# Altium PCB PCB1.PcbDoc (part 7 of 10)
Units mm, origin at the board's own origin, x right, y up, seen from the top; angles counter-clockwise.
Board outline 171.83 x 244.04 mm, 2 copper layers (Top Layer, Bottom Layer); 100 components, 186 nets, 878 pads, 221 vias.
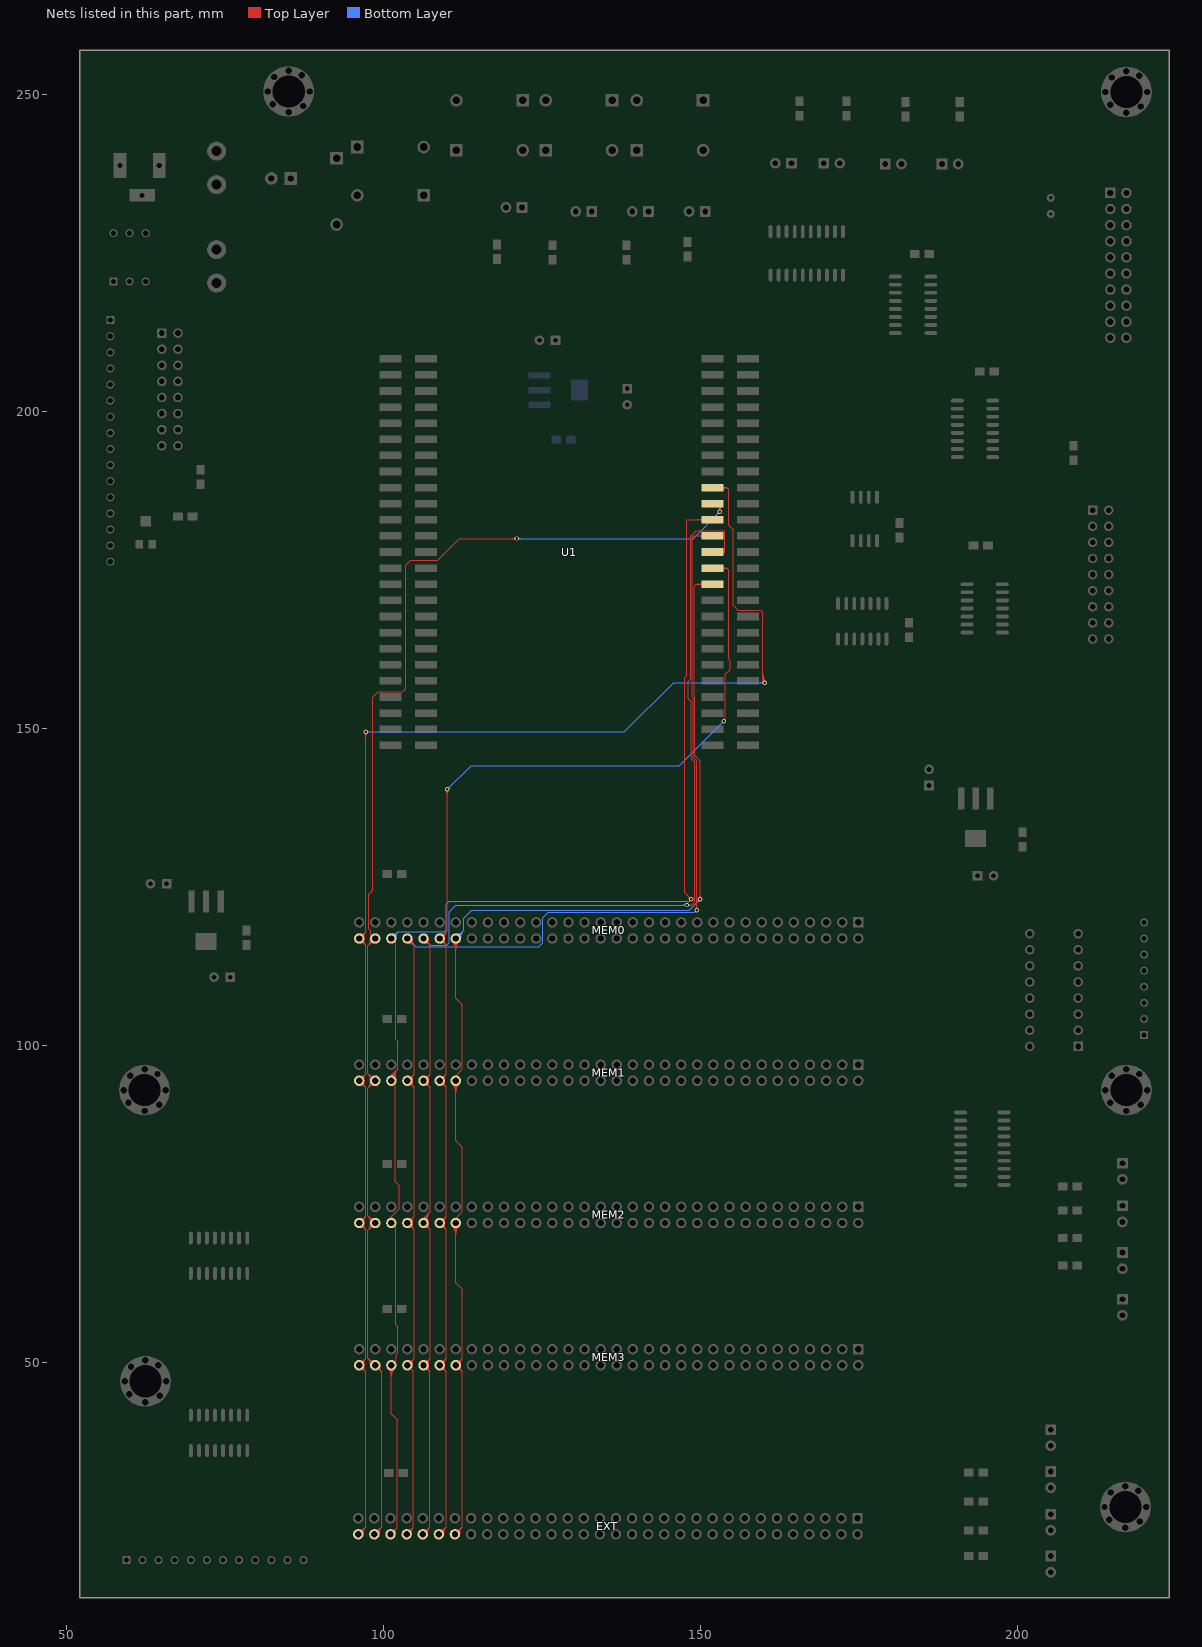
[diagram p7: the nets of this part, all layers, seen from the top]

## Via types
v1: diameter 0.7, hole 0.4, Top Layer to Bottom Layer, 221 vias

## Nets (pads, with @x,y where several pads share a name; then routed paths per layer and width w, separated by ;. In a path a pad name is that pad's centre, name@x,y a point inside that pad or via, vN(x,y) a via of type N, cw(c..) or ccw(c..) an arc to the next point about the centre after c; other vN are vias at no path point) (continued)
D25: EXT.52 MEM0.52 MEM1.52 MEM2.52 MEM3.52 U1.29 | length 240.2
  Top Layer w0.152: MEM2.52@110.85,71.437 cw(c109.571,70.159) 111.379,70.159 cw(c113.187,70.159) MEM2.52@111.908,71.437 ; MEM1.52@110.85,93.874 cw(c109.571,92.596) 111.379,92.596 cw(c113.187,92.596) MEM1.52@111.908,93.874 ; MEM0.52@110.85,116.311 cw(c109.571,115.032) 111.379,115.032 cw(c113.187,115.032) MEM0.52@111.908,116.311 ; MEM2.52@110.957,71.545 cw(c109.939,70.527) 111.379,70.527 cw(c112.819,70.527) MEM2.52@111.801,71.545 ; MEM1.52@110.957,93.982 cw(c109.939,92.963) 111.379,92.963 cw(c112.819,92.963) MEM1.52@111.801,93.982 ; MEM0.52@110.957,116.418 cw(c109.939,115.4) 111.379,115.4 cw(c112.819,115.4) MEM0.52@111.801,116.418 ; MEM2.52@111.065,71.653 cw(c110.307,70.895) 111.379,70.895 cw(c112.451,70.895) MEM2.52@111.693,71.653 ; MEM1.52@111.065,94.089 cw(c110.307,93.331) 111.379,93.331 cw(c112.451,93.331) MEM1.52@111.693,94.089 ; MEM0.52@111.065,116.526 cw(c110.307,115.768) 111.379,115.768 cw(c112.451,115.768) MEM0.52@111.693,116.526 ; EXT.52@111.252,22.86 112.395,24.003 ; EXT.52@111.288,23.302 ccw(c111.355,24.112) 111.93,23.538 ccw(c112.504,22.963) EXT.52@111.694,22.896 ; EXT.52@111.301,23.454 ccw(c111.391,24.542) 112.162,23.77 ccw(c112.934,22.999) EXT.52@111.846,22.909 ; EXT.52@111.314,23.606 ccw(c111.426,24.972) 112.395,24.003 ; MEM0.52@111.379,116.84 111.379,107.417 112.42,106.375 112.42,96.19 111.379,95.148 MEM1.52@111.379,94.403 111.379,84.963 112.42,83.922 112.42,73.762 111.379,72.72 MEM2.52@111.379,71.967 111.379,62.56 112.42,61.519 112.42,50.571 ; MEM3.52@111.448,49.969 ccw(c111.546,50.598) 111.996,50.147 ccw(c112.447,49.697) MEM3.52@111.818,49.599 ; MEM3.52@111.457,49.093 cw(c111.56,48.507) 111.981,48.928 cw(c112.402,49.349) MEM3.52@111.816,49.452 ; MEM3.52@111.471,50.119 ccw(c111.604,50.964) 112.208,50.359 ccw(c112.813,49.755) MEM3.52@111.968,49.622 ; MEM3.52@111.483,48.943 cw(c111.623,48.155) 112.188,48.721 cw(c112.754,49.286) MEM3.52@111.966,49.426 ; MEM3.52@111.495,50.27 ccw(c111.661,51.331) 112.42,50.571 ; MEM3.52@111.51,48.793 cw(c111.685,47.804) 112.395,48.514 ; EXT.52@111.998,22.922 cw(c113.364,23.034) 112.395,24.003 ; MEM3.52@112.116,49.399 ccw(c113.105,49.224) 112.395,48.514 ; MEM3.52@112.119,49.646 cw(c113.18,49.812) 112.42,50.571 ; v1@149.743,123.204 ccw(c149.275,123.672) 149.936,123.672 ccw(c150.597,123.672) v1@150.13,123.204 ; v1(149.936,123.011) 149.936,144.837 149.098,145.676 149.098,155.174 149.022,155.25 149.022,172.403 149.339,172.72 U1.29@151.892,172.72 ; U1.29@150.372,172.35 ccw(c149.477,171.455) 149.477,172.72 ccw(c149.477,173.985) U1.29@150.372,173.09 ; U1.29@150.479,172.457 ccw(c149.845,171.823) 149.845,172.72 ccw(c149.845,173.617) U1.29@150.479,172.983 ; 112.395,24.003 112.395,48.514 ; 112.395,48.514 MEM3.52@111.379,49.53 112.42,50.571
  Bottom Layer w0.152: MEM0.52@111.379,116.84 112.674,118.135 112.674,120.066 113.894,121.285 148.211,121.285 v1(149.936,123.011) ; MEM0.52@111.379,117.284 ccw(c111.379,118.356) 112.137,117.598 ccw(c112.895,116.84) MEM0.52@111.823,116.84 ; MEM0.52@111.379,117.436 ccw(c111.379,118.876) 112.397,117.858 ccw(c113.415,116.84) MEM0.52@111.975,116.84 ; MEM0.52@111.379,117.589 ccw(c111.379,119.397) 112.657,118.118 ccw(c113.936,116.84) MEM0.52@112.128,116.84 ; v1@149.662,123.011 cw(c149.001,123.011) 149.469,122.543 cw(c149.936,122.076) v1@149.936,122.737
D26: EXT.54 MEM0.54 MEM1.54 MEM2.54 MEM3.54 U1.27 | length 246.5
  Top Layer w0.152: EXT.54@108.712,22.86 109.855,24.003 ; EXT.54@108.748,23.302 ccw(c108.815,24.112) 109.39,23.538 ccw(c109.964,22.963) EXT.54@109.154,22.896 ; EXT.54@108.761,23.454 ccw(c108.851,24.542) 109.622,23.77 ccw(c110.394,22.999) EXT.54@109.306,22.909 ; EXT.54@108.774,23.606 ccw(c108.886,24.972) 109.855,24.003 ; MEM0.54@108.861,117.283 ccw(c108.906,118.189) 109.547,117.548 ccw(c110.188,116.907) MEM0.54@109.282,116.862 ; MEM0.54@108.869,117.436 ccw(c108.929,118.652) 109.79,117.791 ccw(c110.651,116.93) MEM0.54@109.435,116.87 ; MEM0.54@108.876,117.588 ccw(c108.952,119.115) 110.033,118.034 ; MEM3.54@108.908,49.969 ccw(c109.006,50.598) 109.456,50.147 ccw(c109.907,49.697) MEM3.54@109.278,49.599 ; MEM2.54@108.908,71.528 cw(c109.006,70.899) 109.456,71.349 cw(c109.907,71.799) MEM2.54@109.278,71.898 ; MEM2.54@108.908,72.405 ccw(c109.006,73.034) 109.456,72.584 ccw(c109.907,72.134) MEM2.54@109.278,72.035 ; MEM1.54@108.908,93.965 cw(c109.006,93.336) 109.456,93.786 cw(c109.907,94.236) MEM1.54@109.278,94.335 ; MEM1.54@108.908,94.842 ccw(c109.006,95.471) 109.456,95.021 ccw(c109.907,94.571) MEM1.54@109.278,94.472 ; MEM0.54@108.908,116.401 cw(c109.006,115.772) 109.456,116.223 cw(c109.907,116.673) MEM0.54@109.278,116.771 ; MEM3.54@108.917,49.093 cw(c109.02,48.507) 109.441,48.928 cw(c109.862,49.349) MEM3.54@109.276,49.452 ; MEM3.54@108.931,50.119 ccw(c109.064,50.964) 109.668,50.359 ccw(c110.273,49.755) MEM3.54@109.428,49.622 ; MEM2.54@108.931,71.377 cw(c109.064,70.533) 109.668,71.137 cw(c110.273,71.742) MEM2.54@109.428,71.874 ; MEM2.54@108.931,72.556 ccw(c109.064,73.401) 109.668,72.796 ccw(c110.273,72.191) MEM2.54@109.428,72.059 ; MEM1.54@108.931,93.814 cw(c109.064,92.969) 109.668,93.574 cw(c110.273,94.179) MEM1.54@109.428,94.311 ; MEM1.54@108.931,94.993 ccw(c109.064,95.837) 109.668,95.233 ccw(c110.273,94.628) MEM1.54@109.428,94.496 ; MEM0.54@108.931,116.251 cw(c109.064,115.406) 109.668,116.011 cw(c110.273,116.615) MEM0.54@109.428,116.748 ; MEM3.54@108.943,48.943 cw(c109.083,48.155) 109.648,48.721 cw(c110.214,49.286) MEM3.54@109.426,49.426 ; MEM3.54@108.955,50.27 ccw(c109.121,51.331) 109.88,50.571 ; MEM2.54@108.955,71.227 cw(c109.121,70.166) 109.88,70.925 ; MEM2.54@108.955,72.706 ccw(c109.121,73.767) 109.88,73.008 ; MEM1.54@108.955,93.664 cw(c109.121,92.603) 109.88,93.362 ; MEM1.54@108.955,95.143 ccw(c109.121,96.204) 109.88,95.445 ; MEM0.54@108.955,116.1 cw(c109.121,115.039) 109.88,115.799 ; MEM3.54@108.97,48.793 cw(c109.145,47.804) 109.855,48.514 ; EXT.54@109.458,22.922 cw(c110.824,23.034) 109.855,24.003 ; MEM3.54@109.576,49.399 ccw(c110.565,49.224) 109.855,48.514 ; MEM3.54@109.579,49.646 cw(c110.64,49.812) 109.88,50.571 ; MEM2.54@109.579,71.851 ccw(c110.64,71.685) 109.88,70.925 ; MEM2.54@109.579,72.083 cw(c110.64,72.249) 109.88,73.008 ; MEM1.54@109.579,94.287 ccw(c110.64,94.121) 109.88,93.362 ; MEM1.54@109.579,94.519 cw(c110.64,94.685) 109.88,95.445 ; MEM0.54@109.579,116.724 ccw(c110.64,116.558) 109.88,115.799 ; MEM0.54@109.587,116.877 cw(c111.114,116.953) 110.033,118.034 ; v1@109.839,140.167 cw(c109.372,139.699) 110.033,139.699 cw(c110.694,139.699) v1@110.226,140.167 ; v1(110.033,140.36) 110.033,118.034 ; U1.27@151.892,175.26 154.089,175.26 ; U1.27@153.339,175.037 cw(c153.784,174.704) 153.784,175.26 cw(c153.784,175.816) U1.27@153.339,175.483 ; U1.27@153.461,174.946 cw(c154.089,174.475) 154.089,175.26 ; U1.27@153.461,175.574 ccw(c154.089,176.045) 154.089,175.26 ; v1(153.67,151.13) 153.906,151.366 153.906,158.49 154.68,159.265 154.68,160.68 154.407,160.954 154.407,174.942 154.089,175.26 ; 109.855,24.003 109.855,48.514 ; 109.855,48.514 MEM3.54@108.839,49.53 109.88,50.571 ; 109.88,50.571 109.88,70.925 ; 109.88,70.925 MEM2.54@108.839,71.967 109.88,73.008 ; 109.88,73.008 109.88,93.362 ; 109.88,93.362 MEM1.54@108.839,94.403 109.88,95.445 ; 109.88,95.445 109.88,115.799 ; 109.88,115.799 MEM0.54@108.839,116.84 110.033,118.034
  Bottom Layer w0.152: v1(110.033,140.36) 113.792,144.12 146.66,144.12 v1(153.67,151.13) ; v1@110.033,140.634 ccw(c110.033,141.295) 110.5,140.828 ccw(c110.968,140.36) v1@110.307,140.36
D27: EXT.56 MEM0.56 MEM1.56 MEM2.56 MEM3.56 U1.25 | length 265.8
  Top Layer w0.152: EXT.56@106.172,22.86 107.315,24.003 ; EXT.56@106.208,23.302 ccw(c106.275,24.112) 106.85,23.538 ccw(c107.424,22.963) EXT.56@106.614,22.896 ; EXT.56@106.221,23.454 ccw(c106.311,24.542) 107.082,23.77 ccw(c107.854,22.999) EXT.56@106.766,22.909 ; EXT.56@106.234,23.606 ccw(c106.346,24.972) 107.315,24.003 ; MEM2.56@106.287,71.962 cw(c107.14,72.275) 106.497,72.918 ; MEM0.56@106.299,116.84 107.34,115.799 ; MEM3.56@106.368,49.969 ccw(c106.466,50.598) 106.916,50.147 ccw(c107.367,49.697) MEM3.56@106.738,49.599 ; MEM2.56@106.368,71.528 cw(c106.466,70.899) 106.916,71.349 cw(c107.367,71.799) MEM2.56@106.738,71.898 ; MEM1.56@106.368,93.965 cw(c106.466,93.336) 106.916,93.786 cw(c107.367,94.236) MEM1.56@106.738,94.335 ; MEM1.56@106.368,94.842 ccw(c106.466,95.471) 106.916,95.021 ccw(c107.367,94.571) MEM1.56@106.738,94.472 ; MEM0.56@106.368,116.401 cw(c106.466,115.772) 106.916,116.223 cw(c107.367,116.673) MEM0.56@106.738,116.771 ; MEM3.56@106.377,49.093 cw(c106.48,48.507) 106.901,48.928 cw(c107.322,49.349) MEM3.56@106.736,49.452 ; MEM3.56@106.391,50.119 ccw(c106.524,50.964) 107.128,50.359 ccw(c107.733,49.755) MEM3.56@106.888,49.622 ; MEM2.56@106.391,71.377 cw(c106.524,70.533) 107.128,71.137 cw(c107.733,71.742) MEM2.56@106.888,71.874 ; MEM1.56@106.391,93.814 cw(c106.524,92.969) 107.128,93.574 cw(c107.733,94.179) MEM1.56@106.888,94.311 ; MEM1.56@106.391,94.993 ccw(c106.524,95.837) 107.128,95.233 ccw(c107.733,94.628) MEM1.56@106.888,94.496 ; MEM0.56@106.391,116.251 cw(c106.524,115.406) 107.128,116.011 cw(c107.733,116.615) MEM0.56@106.888,116.748 ; MEM3.56@106.403,48.943 cw(c106.543,48.155) 107.108,48.721 cw(c107.674,49.286) MEM3.56@106.886,49.426 ; MEM3.56@106.415,50.27 ccw(c106.581,51.331) 107.34,50.571 ; MEM2.56@106.415,71.227 cw(c106.581,70.166) 107.34,70.925 ; MEM1.56@106.415,93.664 cw(c106.581,92.603) 107.34,93.362 ; MEM1.56@106.415,95.143 ccw(c106.581,96.204) 107.34,95.445 ; MEM0.56@106.415,116.1 cw(c106.581,115.039) 107.34,115.799 ; MEM3.56@106.43,48.793 cw(c106.605,47.804) 107.315,48.514 ; MEM2.56@106.43,72.015 cw(c107.387,72.366) 106.666,73.087 ; MEM2.56@106.573,72.067 cw(c107.633,72.457) 106.834,73.256 ; MEM2.56@106.716,72.12 cw(c107.88,72.547) 107.003,73.424 ; MEM2.56@106.859,72.172 cw(c108.127,72.638) 107.172,73.593 ; EXT.56@106.918,22.922 cw(c108.284,23.034) 107.315,24.003 ; MEM2.56@107.002,72.225 cw(c108.374,72.728) 107.34,73.762 ; MEM3.56@107.036,49.399 ccw(c108.025,49.224) 107.315,48.514 ; MEM3.56@107.039,49.646 cw(c108.1,49.812) 107.34,50.571 ; MEM2.56@107.039,71.851 ccw(c108.1,71.685) 107.34,70.925 ; MEM1.56@107.039,94.287 ccw(c108.1,94.121) 107.34,93.362 ; MEM1.56@107.039,94.519 cw(c108.1,94.685) 107.34,95.445 ; MEM0.56@107.039,116.724 ccw(c108.1,116.558) 107.34,115.799 ; v1(147.853,122.123) 148.641,122.123 149.067,122.549 149.067,144.651 148.539,145.179 148.539,154.158 148.024,154.673 148.024,157.391 148.443,157.81 148.443,180.295 149.301,181.153 153.822,181.153 153.848,181.127 153.848,177.825 153.822,177.8 ; v1@148.047,121.93 cw(c148.514,121.462) 148.514,122.123 cw(c148.514,122.784) v1@148.047,122.317 ; U1.25@151.892,177.8 153.822,177.8 ; U1.25@153.527,177.602 cw(c153.822,177.481) 153.822,177.8 ; U1.25@153.527,177.998 ccw(c153.822,178.119) 153.822,177.8 ; 107.315,24.003 107.315,48.514 ; 107.315,48.514 MEM3.56@106.299,49.53 107.34,50.571 ; 107.34,50.571 107.34,70.925 ; 107.34,70.925 MEM2.56@106.299,71.967 106.299,72.72 107.34,73.762 ; 107.34,73.762 107.34,93.362 ; 107.34,93.362 MEM1.56@106.299,94.403 107.34,95.445 ; 107.34,95.445 107.34,115.799
  Bottom Layer w0.152: MEM0.56@106.299,116.84 107.327,115.812 ; MEM0.56@106.372,116.402 cw(c106.474,115.795) 106.909,116.23 cw(c107.344,116.665) MEM0.56@106.737,116.767 ; MEM0.56@106.397,116.252 cw(c106.534,115.437) 107.118,116.021 cw(c107.702,116.605) MEM0.56@106.887,116.742 ; MEM0.56@106.422,116.101 cw(c106.594,115.078) 107.327,115.812 ; MEM0.56@107.038,116.717 ccw(c108.061,116.545) 107.327,115.812 ; v1@147.66,121.93 ccw(c147.192,121.462) 147.192,122.123 ccw(c147.192,122.784) v1@147.66,122.317 ; v1(147.853,122.123) 111.366,122.123 110.338,121.094 110.338,116.205 109.944,115.812 107.327,115.812
D28: EXT.58 MEM0.58 MEM1.58 MEM2.58 MEM3.58 U1.23 | length 255.7
  Top Layer w0.152: EXT.58@103.632,22.86 104.673,23.901 ; EXT.58@103.701,23.299 ccw(c103.799,23.928) 104.249,23.477 ccw(c104.7,23.027) EXT.58@104.071,22.929 ; EXT.58@103.724,23.449 ccw(c103.857,24.294) 104.461,23.689 ccw(c105.066,23.085) EXT.58@104.221,22.952 ; EXT.58@103.748,23.6 ccw(c103.914,24.661) 104.673,23.901 ; MEM0.58@103.759,116.84 104.8,115.799 ; MEM3.58@103.828,49.969 ccw(c103.926,50.598) 104.376,50.147 ccw(c104.827,49.697) MEM3.58@104.198,49.599 ; MEM2.58@103.828,71.528 cw(c103.926,70.899) 104.376,71.349 cw(c104.827,71.799) MEM2.58@104.198,71.898 ; MEM2.58@103.828,72.405 ccw(c103.926,73.034) 104.376,72.584 ccw(c104.827,72.134) MEM2.58@104.198,72.035 ; MEM1.58@103.828,93.965 cw(c103.926,93.336) 104.376,93.786 cw(c104.827,94.236) MEM1.58@104.198,94.335 ; MEM1.58@103.828,94.842 ccw(c103.926,95.471) 104.376,95.021 ccw(c104.827,94.571) MEM1.58@104.198,94.472 ; MEM0.58@103.828,116.401 cw(c103.926,115.772) 104.376,116.223 cw(c104.827,116.673) MEM0.58@104.198,116.771 ; MEM3.58@103.851,50.119 ccw(c103.984,50.964) 104.588,50.359 ccw(c105.193,49.755) MEM3.58@104.348,49.622 ; MEM2.58@103.851,71.377 cw(c103.984,70.533) 104.588,71.137 cw(c105.193,71.742) MEM2.58@104.348,71.874 ; MEM2.58@103.851,72.556 ccw(c103.984,73.401) 104.588,72.796 ccw(c105.193,72.191) MEM2.58@104.348,72.059 ; MEM1.58@103.851,93.814 cw(c103.984,92.969) 104.588,93.574 cw(c105.193,94.179) MEM1.58@104.348,94.311 ; MEM1.58@103.851,94.993 ccw(c103.984,95.837) 104.588,95.233 ccw(c105.193,94.628) MEM1.58@104.348,94.496 ; MEM0.58@103.851,116.251 cw(c103.984,115.406) 104.588,116.011 cw(c105.193,116.615) MEM0.58@104.348,116.748 ; MEM3.58@103.875,50.27 ccw(c104.041,51.331) 104.8,50.571 ; MEM2.58@103.875,71.227 cw(c104.041,70.166) 104.8,70.925 ; MEM2.58@103.875,72.706 ccw(c104.041,73.767) 104.8,73.008 ; MEM1.58@103.875,93.664 cw(c104.041,92.603) 104.8,93.362 ; MEM1.58@103.875,95.143 ccw(c104.041,96.204) 104.8,95.445 ; MEM0.58@103.875,116.1 cw(c104.041,115.039) 104.8,115.799 ; EXT.58@104.372,22.976 cw(c105.433,23.142) 104.673,23.901 ; MEM3.58@104.499,49.646 cw(c105.56,49.812) 104.8,50.571 ; MEM2.58@104.499,71.851 ccw(c105.56,71.685) 104.8,70.925 ; MEM2.58@104.499,72.083 cw(c105.56,72.249) 104.8,73.008 ; MEM1.58@104.499,94.287 ccw(c105.56,94.121) 104.8,93.362 ; MEM1.58@104.499,94.519 cw(c105.56,94.685) 104.8,95.445 ; MEM0.58@104.499,116.724 ccw(c105.56,116.558) 104.8,115.799 ; v1@149.184,121.466 ccw(c148.716,121.933) 149.377,121.933 ccw(c150.038,121.933) v1@149.571,121.466 ; v1(149.377,121.272) 149.377,144.812 148.819,145.371 148.819,154.895 148.723,154.991 148.723,180.168 148.895,180.34 U1.23@151.892,180.34 ; U1.23@150.372,179.97 ccw(c149.477,179.075) 149.477,180.34 ccw(c149.477,181.605) U1.23@150.372,180.71 ; U1.23@150.479,180.077 ccw(c149.845,179.443) 149.845,180.34 ccw(c149.845,181.237) U1.23@150.479,180.603 ; 104.673,23.901 104.673,48.616 MEM3.58@103.759,49.53 104.8,50.571 ; 104.8,50.571 104.8,70.925 ; 104.8,70.925 MEM2.58@103.759,71.967 104.8,73.008 ; 104.8,73.008 104.8,93.362 ; 104.8,93.362 MEM1.58@103.759,94.403 104.8,95.445 ; 104.8,95.445 104.8,115.799
  Bottom Layer w0.152: MEM0.58@103.759,116.091 cw(c103.759,114.283) 105.037,115.562 cw(c106.316,116.84) MEM0.58@104.508,116.84 ; MEM0.58@103.759,116.244 cw(c103.759,114.804) 104.777,115.822 cw(c105.795,116.84) MEM0.58@104.355,116.84 ; MEM0.58@103.759,116.396 cw(c103.759,115.324) 104.517,116.082 cw(c105.275,116.84) MEM0.58@104.203,116.84 ; MEM0.58@103.759,116.84 105.067,115.532 124.511,115.532 125.12,116.141 125.12,120.129 125.946,120.955 149.06,120.955 v1(149.377,121.272)
D29: EXT.60 MEM0.60 MEM1.60 MEM2.60 MEM3.60 U1.21 | length 245.5
  Top Layer w0.152: MEM3.60@100.69,49.001 cw(c99.411,47.722) 101.219,47.722 cw(c103.027,47.722) MEM3.60@101.748,49.001 ; MEM3.60@100.797,49.108 cw(c99.779,48.09) 101.219,48.09 cw(c102.659,48.09) MEM3.60@101.641,49.108 ; MEM3.60@100.905,49.216 cw(c100.147,48.458) 101.219,48.458 cw(c102.291,48.458) MEM3.60@101.533,49.216 ; MEM2.60@101.043,72.695 ccw(c100.989,72.918) 101.219,72.918 ; MEM1.60@101.064,94.344 cw(c101.898,94.665) 101.266,95.297 ; EXT.60@101.092,22.86 102.133,23.901 ; EXT.60@101.161,23.299 ccw(c101.259,23.928) 101.709,23.477 ccw(c102.16,23.027) EXT.60@101.531,22.929 ; EXT.60@101.184,23.449 ccw(c101.317,24.294) 101.921,23.689 ccw(c102.526,23.085) EXT.60@101.681,22.952 ; MEM1.60@101.207,94.399 cw(c102.138,94.758) 101.432,95.463 ; EXT.60@101.208,23.6 ccw(c101.374,24.661) 102.133,23.901 ; MEM0.60@101.219,116.84 101.905,116.154 101.905,100.99 102.26,100.635 102.26,96.291 ; MEM1.60@101.349,94.453 cw(c102.377,94.85) 101.598,95.629 ; MEM2.60@101.395,72.695 cw(c101.449,72.918) 101.219,72.918 ; MEM1.60@101.491,94.508 cw(c102.616,94.942) 101.763,95.794 ; MEM1.60@101.633,94.563 cw(c102.855,95.034) 101.929,95.96 ; MEM1.60@101.775,94.618 cw(c103.094,95.126) 102.095,96.126 ; EXT.60@101.832,22.976 cw(c102.893,23.142) 102.133,23.901 ; MEM1.60@101.918,94.673 cw(c103.333,95.219) 102.26,96.291 ; v1@148.24,123.012 ccw(c147.579,123.012) 148.046,123.48 ccw(c148.514,123.947) v1@148.514,123.286 ; v1(148.514,123.012) 147.465,124.061 147.465,157.95 147.828,158.313 147.853,182.88 U1.21@151.892,182.88 ; U1.21@150.372,182.51 ccw(c149.477,181.615) 149.477,182.88 ccw(c149.477,184.145) U1.21@150.372,183.25 ; U1.21@150.479,182.617 ccw(c149.845,181.983) 149.845,182.88 ccw(c149.845,183.777) U1.21@150.479,183.143 ; 101.219,72.918 102.489,74.188 102.489,77.826 101.829,78.486 101.829,93.794 MEM1.60@101.219,94.403 101.219,95.25 102.26,96.291 ; 101.219,72.918 MEM2.60@101.219,71.967 101.905,71.281 101.905,55.956 102.26,55.601 102.26,51.486 101.981,51.206 101.981,50.292 MEM3.60@101.219,49.53 101.219,41.849 102.133,40.934 102.133,23.901
  Bottom Layer w0.152: MEM0.60@101.219,116.84 102.26,117.881 ; MEM0.60@101.288,117.279 ccw(c101.386,117.908) 101.836,117.457 ccw(c102.287,117.007) MEM0.60@101.658,116.909 ; MEM0.60@101.311,117.429 ccw(c101.444,118.274) 102.048,117.669 ccw(c102.653,117.065) MEM0.60@101.808,116.932 ; MEM0.60@101.335,117.58 ccw(c101.501,118.641) 102.26,117.881 ; MEM0.60@101.959,116.956 cw(c103.02,117.122) 102.26,117.881 ; v1(148.514,123.012) 148.196,122.695 110.338,122.695 109.88,122.237 109.88,118.224 109.537,117.881 102.26,117.881
D30: EXT.62 MEM0.62 MEM1.62 MEM2.62 MEM3.62 U1.19 | length 269.5
  Top Layer w0.152: MEM3.62@97.933,49.592 ccw(c96.567,49.704) 97.536,50.673 ; MEM2.62@97.933,71.905 cw(c96.567,71.793) 97.536,70.824 ; MEM2.62@97.933,72.028 ccw(c96.567,72.141) 97.536,73.11 ; MEM1.62@97.933,94.342 cw(c96.567,94.229) 97.536,93.26 ; MEM1.62@97.933,94.465 ccw(c96.567,94.577) 97.536,95.546 ; MEM0.62@97.933,116.778 cw(c96.567,116.666) 97.536,115.697 ; MEM3.62@98.085,49.579 ccw(c96.997,49.669) 97.769,50.44 ccw(c98.54,51.212) MEM3.62@98.63,50.124 ; MEM2.62@98.085,71.918 cw(c96.997,71.828) 97.769,71.056 cw(c98.54,70.285) MEM2.62@98.63,71.372 ; MEM2.62@98.085,72.016 ccw(c96.997,72.105) 97.769,72.877 ccw(c98.54,73.649) MEM2.62@98.63,72.561 ; MEM1.62@98.085,94.354 cw(c96.997,94.265) 97.769,93.493 cw(c98.54,92.721) MEM1.62@98.63,93.809 ; MEM1.62@98.085,94.452 ccw(c96.997,94.542) 97.769,95.314 ccw(c98.54,96.085) MEM1.62@98.63,94.998 ; MEM0.62@98.085,116.791 cw(c96.997,116.701) 97.769,115.93 cw(c98.54,115.158) MEM0.62@98.63,116.246 ; MEM3.62@98.237,49.566 ccw(c97.427,49.633) 98.001,50.208 ccw(c98.576,50.782) MEM3.62@98.643,49.972 ; MEM2.62@98.237,71.93 cw(c97.427,71.863) 98.001,71.289 cw(c98.576,70.715) MEM2.62@98.643,71.524 ; MEM2.62@98.237,72.003 ccw(c97.427,72.07) 98.001,72.644 ccw(c98.576,73.219) MEM2.62@98.643,72.409 ; MEM1.62@98.237,94.367 cw(c97.427,94.3) 98.001,93.726 cw(c98.576,93.151) MEM1.62@98.643,93.961 ; MEM1.62@98.237,94.44 ccw(c97.427,94.507) 98.001,95.081 ccw(c98.576,95.655) MEM1.62@98.643,94.846 ; MEM0.62@98.237,116.804 cw(c97.427,116.737) 98.001,116.162 cw(c98.576,115.588) MEM0.62@98.643,116.398 ; EXT.62@98.552,22.86 99.695,24.003 ; EXT.62@98.588,23.302 ccw(c98.655,24.112) 99.23,23.538 ccw(c99.804,22.963) EXT.62@98.994,22.896 ; EXT.62@98.601,23.454 ccw(c98.691,24.542) 99.462,23.77 ccw(c100.234,22.999) EXT.62@99.146,22.909 ; EXT.62@98.614,23.606 ccw(c98.726,24.972) 99.695,24.003 ; MEM3.62@98.617,50.276 cw(c98.505,51.642) 97.536,50.673 ; MEM2.62@98.617,71.22 ccw(c98.505,69.855) 97.536,70.824 ; MEM2.62@98.617,72.713 cw(c98.505,74.078) 97.536,73.11 ; MEM1.62@98.617,93.657 ccw(c98.505,92.292) 97.536,93.26 ; MEM1.62@98.617,95.15 cw(c98.505,96.515) 97.536,95.546 ; MEM0.62@98.617,116.094 ccw(c98.505,114.728) 97.536,115.697 ; MEM3.62@98.757,49.093 cw(c98.86,48.507) 99.281,48.928 cw(c99.702,49.349) MEM3.62@99.116,49.452 ; MEM3.62@98.783,48.943 cw(c98.923,48.155) 99.488,48.721 cw(c100.054,49.286) MEM3.62@99.266,49.426 ; MEM3.62@98.81,48.793 cw(c98.985,47.804) 99.695,48.514 ; EXT.62@99.298,22.922 cw(c100.664,23.034) 99.695,24.003 ; MEM3.62@99.416,49.399 ccw(c100.405,49.224) 99.695,48.514 ; v1@120.787,179.74 ccw(c120.319,179.273) 120.319,179.934 ccw(c120.319,180.595) v1@120.787,180.127 ; v1(120.98,179.934) 111.925,179.934 108.521,176.53 104.28,176.53 103.48,175.73 103.48,156.21 103.013,155.743 99.136,155.743 98.323,154.93 98.323,124.485 97.638,123.8 97.638,118.389 97.993,118.034 97.993,116.84 MEM0.62@98.679,116.84 97.536,115.697 ; U1.19@151.892,185.42 153.035,185.42 v1(153.035,184.15) cw(c154.296,184.15) U1.19@153.41,185.047 ; U1.19@152.672,185.05 cw(c151.794,184.172) v1@153.035,184.172 ; U1.19@152.779,185.157 cw(c152.162,184.54) 153.035,184.54 ; v1@152.841,184.344 ccw(c152.374,184.811) 153.035,184.811 ccw(c153.696,184.811) v1@153.229,184.344 ; 153.035,184.515 cw(c153.936,184.515) U1.19@153.303,185.156 ; 97.536,50.673 MEM3.62@98.679,49.53 99.695,48.514 ; 97.536,50.673 97.536,70.824 ; 97.536,70.824 MEM2.62@98.679,71.967 97.536,73.11 ; 97.536,73.11 97.536,93.26 ; 97.536,93.26 MEM1.62@98.679,94.403 97.536,95.546 ; 97.536,95.546 97.536,115.697 ; 99.695,24.003 99.695,48.514
  Bottom Layer w0.152: v1(120.98,179.934) 148.819,179.934 v1(153.035,184.15) ; v1@121.174,179.74 cw(c121.641,179.273) 121.641,179.934 cw(c121.641,180.595) v1@121.174,180.127 ; v1@152.761,184.15 cw(c152.1,184.15) 152.568,183.683 cw(c153.035,183.215) v1@153.035,183.876
D31: EXT.64 MEM0.64 MEM1.64 MEM2.64 MEM3.64 U1.17 | length 287.4
  Top Layer w0.152: EXT.64@96.012,22.86 97.155,24.003 ; EXT.64@96.048,23.302 ccw(c96.115,24.112) 96.69,23.538 ccw(c97.264,22.963) EXT.64@96.454,22.896 ; EXT.64@96.061,23.454 ccw(c96.151,24.542) 96.922,23.77 ccw(c97.694,22.999) EXT.64@96.606,22.909 ; EXT.64@96.074,23.606 ccw(c96.186,24.972) 97.155,24.003 ; MEM3.64@96.208,49.969 ccw(c96.306,50.598) 96.756,50.147 ccw(c97.207,49.697) MEM3.64@96.578,49.599 ; MEM2.64@96.208,71.528 cw(c96.306,70.899) 96.756,71.349 cw(c97.207,71.799) MEM2.64@96.578,71.898 ; MEM2.64@96.208,72.405 ccw(c96.306,73.034) 96.756,72.584 ccw(c97.207,72.134) MEM2.64@96.578,72.035 ; MEM1.64@96.208,93.965 cw(c96.306,93.336) 96.756,93.786 cw(c97.207,94.236) MEM1.64@96.578,94.335 ; MEM1.64@96.208,94.842 ccw(c96.306,95.471) 96.756,95.021 ccw(c97.207,94.571) MEM1.64@96.578,94.472 ; MEM0.64@96.208,116.401 cw(c96.306,115.772) 96.756,116.223 cw(c97.207,116.673) MEM0.64@96.578,116.771 ; MEM0.64@96.208,117.279 ccw(c96.306,117.908) 96.756,117.457 ccw(c97.207,117.007) MEM0.64@96.578,116.909 ; MEM3.64@96.217,49.093 cw(c96.32,48.507) 96.741,48.928 cw(c97.162,49.349) MEM3.64@96.576,49.452 ; MEM3.64@96.231,50.119 ccw(c96.364,50.964) 96.968,50.359 ccw(c97.573,49.755) MEM3.64@96.728,49.622 ; MEM2.64@96.231,71.377 cw(c96.364,70.533) 96.968,71.137 cw(c97.573,71.742) MEM2.64@96.728,71.874 ; MEM2.64@96.231,72.556 ccw(c96.364,73.401) 96.968,72.796 ccw(c97.573,72.191) MEM2.64@96.728,72.059 ; MEM1.64@96.231,93.814 cw(c96.364,92.969) 96.968,93.574 cw(c97.573,94.179) MEM1.64@96.728,94.311 ; MEM1.64@96.231,94.993 ccw(c96.364,95.837) 96.968,95.233 ccw(c97.573,94.628) MEM1.64@96.728,94.496 ; MEM0.64@96.231,116.251 cw(c96.364,115.406) 96.968,116.011 cw(c97.573,116.615) MEM0.64@96.728,116.748 ; MEM0.64@96.231,117.429 ccw(c96.364,118.274) 96.968,117.669 ccw(c97.573,117.065) MEM0.64@96.728,116.932 ; MEM3.64@96.243,48.943 cw(c96.383,48.155) 96.948,48.721 cw(c97.514,49.286) MEM3.64@96.726,49.426 ; MEM3.64@96.255,50.27 ccw(c96.421,51.331) 97.18,50.571 ; MEM2.64@96.255,71.227 cw(c96.421,70.166) 97.18,70.925 ; MEM2.64@96.255,72.706 ccw(c96.421,73.767) 97.18,73.008 ; MEM1.64@96.255,93.664 cw(c96.421,92.603) 97.18,93.362 ; MEM1.64@96.255,95.143 ccw(c96.421,96.204) 97.18,95.445 ; MEM0.64@96.255,116.1 cw(c96.421,115.039) 97.18,115.799 ; MEM0.64@96.255,117.58 ccw(c96.421,118.641) 97.18,117.881 ; MEM3.64@96.27,48.793 cw(c96.445,47.804) 97.155,48.514 ; EXT.64@96.758,22.922 cw(c98.124,23.034) 97.155,24.003 ; MEM3.64@96.876,49.399 ccw(c97.865,49.224) 97.155,48.514 ; MEM3.64@96.879,49.646 cw(c97.94,49.812) 97.18,50.571 ; MEM2.64@96.879,71.851 ccw(c97.94,71.685) 97.18,70.925 ; MEM2.64@96.879,72.083 cw(c97.94,72.249) 97.18,73.008 ; MEM1.64@96.879,94.287 ccw(c97.94,94.121) 97.18,93.362 ; MEM1.64@96.879,94.519 cw(c97.94,94.685) 97.18,95.445 ; MEM0.64@96.879,116.724 ccw(c97.94,116.558) 97.18,115.799 ; MEM0.64@96.879,116.956 cw(c97.94,117.122) 97.18,117.881 ; v1@96.987,149.235 cw(c96.519,148.767) 97.18,148.767 cw(c97.841,148.767) v1@97.374,149.235 ; v1(97.18,149.428) 97.18,117.881 ; U1.17@151.892,187.96 154.114,187.96 ; U1.17@153.335,187.732 cw(c153.802,187.367) 153.802,187.96 cw(c153.802,188.553) U1.17@153.335,188.188 ; U1.17@153.455,187.638 cw(c154.114,187.124) 154.114,187.96 ; U1.17@153.455,188.282 ccw(c154.114,188.796) 154.114,187.96 ; 159.842,157.407 ccw(c160.353,157.407) v1@159.992,157.046 ; 159.842,157.775 ccw(c160.721,157.775) v1@160.1,157.153 ; 159.842,158.143 ccw(c161.089,158.143) v1@160.207,157.261 ; 159.842,158.511 ccw(c161.457,158.511) v1@160.315,157.369 ; v1(160.122,157.175) 159.842,157.455 159.842,168.275 159.461,168.656 155.892,168.656 155.143,169.405 155.143,181.343 154.432,182.054 154.432,187.642 154.114,187.96 ; 97.155,24.003 97.155,48.514 ; 97.155,48.514 MEM3.64@96.139,49.53 97.18,50.571 ; 97.18,50.571 97.18,70.925 ; 97.18,70.925 MEM2.64@96.139,71.967 97.18,73.008 ; 97.18,73.008 97.18,93.362 ; 97.18,93.362 MEM1.64@96.139,94.403 97.18,95.445 ; 97.18,95.445 97.18,115.799 ; 97.18,115.799 MEM0.64@96.139,116.84 97.18,117.881
  Bottom Layer w0.152: v1(97.18,149.428) 138,149.428 145.747,157.175 v1(160.122,157.175) ; v1@97.374,149.235 cw(c97.841,148.767) 97.841,149.428 cw(c97.841,150.089) v1@97.374,149.622 ; v1@159.928,156.982 ccw(c159.461,156.514) 159.461,157.175 ccw(c159.461,157.836) v1@159.928,157.369